# Altium PCB SparkFun_Tri_Axis_Accel_Breakout-H3LIS331DL.PcbDoc
Units mil, origin at the board's own origin, x right, y up, seen from the top; angles counter-clockwise.
Board outline 800 x 800 mil, 4 copper layers (Top, Route2, Route15, Bottom), stack 18.156 mil thick; 23 components, 10 nets, 51 pads, 12 vias.
Unrouted connection lines stored in the file: 1.
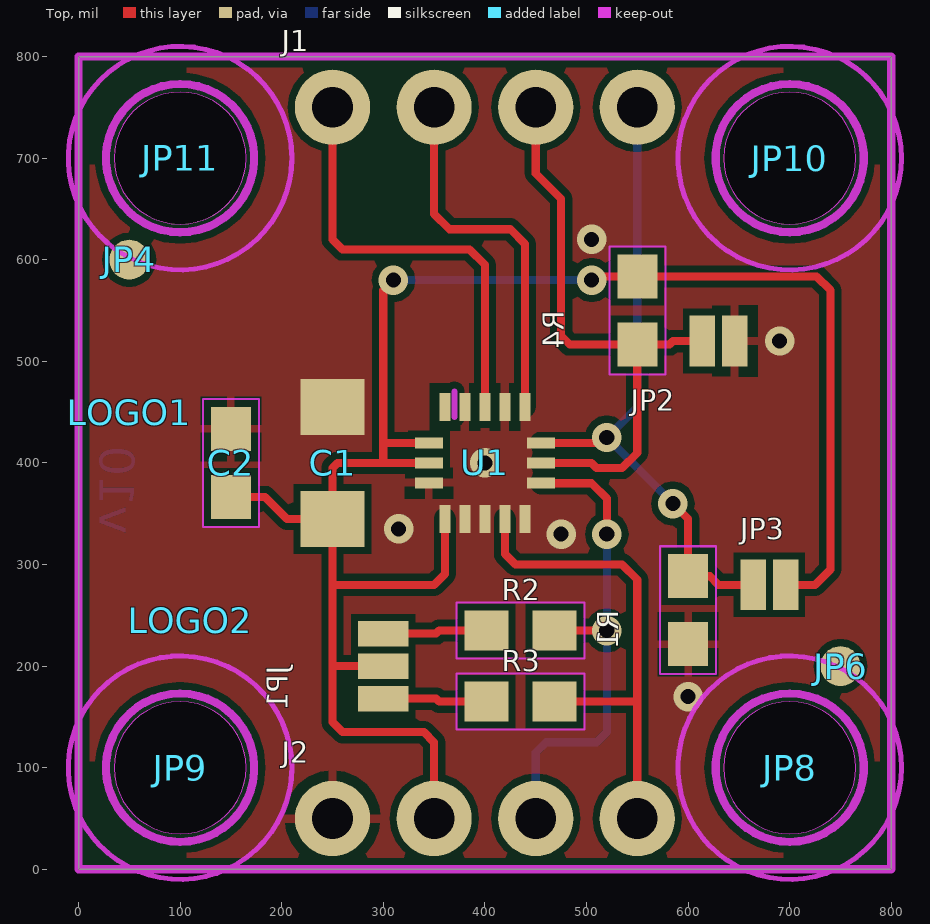
[diagram p0: Top view]
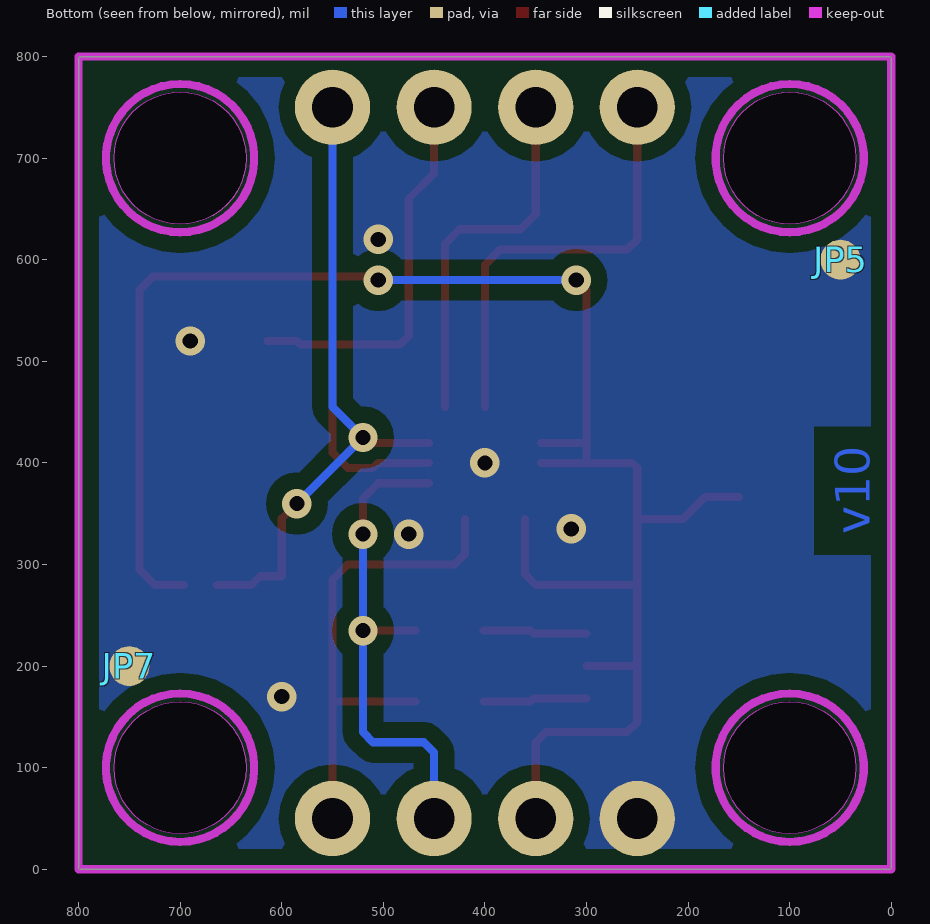
[diagram p1: Bottom view, seen from below]

## Layer stack, top to bottom
Top Solder: solder mask 0.4, Solder Resist, Dk 3.5
Top: signal copper 1.378
Dielectric 1: dielectric 12.6, FR-4, Dk 4.8
Route2: signal copper 1.4
Route15: signal copper 1.4
Bottom: signal copper 1.378
Bottom Solder: solder mask 0.4, Solder Resist, Dk 3.5

## Board outline
0,800 800,800 800,0 0,0
cut-out: 700,35 ccw(c700,100) 765,100 ccw(c700,100) 700,165 ccw(c700,100) 635,100 ccw(c700,100)
cut-out: 100,35 ccw(c100,100) 165,100 ccw(c100,100) 100,165 ccw(c100,100) 35,100 ccw(c100,100)
cut-out: 100,635 ccw(c100,700) 165,700 ccw(c100,700) 100,765 ccw(c100,700) 35,700 ccw(c100,700)
cut-out: 700,635 ccw(c700,700) 765,700 ccw(c700,700) 700,765 ccw(c700,700) 635,700 ccw(c700,700)

## Design rules (kind name [scope] priority, off if disabled: settings)
BoardOutlineClearance mdCopperDimension [All] p1: gap=10 ignorepadtopadclearanceinfootprint=FALSE except(0: Arc-SplitContinuation Track-SplitContinuation SMDPad-SplitContinuation THPad-SplitContinuation Via-SplitContinuation Fill-SplitContinuation Poly-SplitContinuation Region-SplitContinuation Text-SplitContinuation; 7: Poly-OutlineEdge Poly-CavityEdge Poly-CutoutEdge Poly-SplitBarrior)
Clearance Clearance_for_PolygonClass_Isolate_16 [InPolygonClass('Isolate_16') vs IsArc Or IsTrack Or IsPad Or IsVia Or IsFill Or IsRegion Or IsText] p1: gap=16 ignorepadtopadclearanceinfootprint=FALSE
Clearance "Clearance (Same Net)" [All] p2: gap=7 ignorepadtopadclearanceinfootprint=FALSE
Clearance [All] p3: gap=7 ignorepadtopadclearanceinfootprint=FALSE
HoleSize [All] p1: absolutevalues=TRUE maxlimit=100000 minlimit=15 maxpercent=80.000 minpercent=20.000
HoleToHoleClearance mdDrill [All] p1: gap=7 allowstackedmicrovias=TRUE
MinimumSolderMaskSliver [All] p1 off: minsoldermaskwidth=10
PasteMaskExpansion Expansion_SMDPaste_OFF [InPadClass('SMDPaste_OFF')] p1: expansion=0
PasteMaskExpansion mlMinCreamFrame [All] p2: expansion=0
PolygonConnect PolygonConnect_For_PolygonThermal_ON_Width80000_Gap100000 [InPolygonClass('PolygonThermal_ON_Width80000_Gap100000') vs Not IsVia] p1: connectstyle=Relief reliefconductorwidth=8 reliefentries=4 polygonreliefangle="90 Angle" airgapwidth=10
PolygonConnect ThermalVias [IsVia] p2: connectstyle=Direct reliefconductorwidth=10 reliefentries=4 polygonreliefangle="90 Angle" airgapwidth=10
PolygonConnect [All] p3: connectstyle=Relief reliefconductorwidth=10 reliefentries=4 polygonreliefangle="90 Angle" airgapwidth=10
RoutingVias [All] p1: holewidth=15 width=29 viastyle="Through Hole" minholewidth=15 minwidth=29 maxholewidth=100 maxwidth=100
SolderMaskExpansion mlMinStopFrame [All] p1: expansion=4 istentingtop=FALSE
Width [All] p1: maxlimit=10 minlimit=7 preferedwidth=7
26 further rules are at their usual default settings.

## Classes and differential pairs
polygon class PolygonThermal_ON_Width80000_Gap100000: Polygon_1_Net_GND Polygon_2_Net_GND
polygon class Isolate_16: Polygon_2_Net_GND
pad class SMDPaste_OFF: JP1-1 JP1-2 JP1-3 JP2-1 JP2-2 JP3-1 JP3-2 JP4-1 JP5-1 JP6-1 JP7-1

## Components (designator, comment, footprint, x,y, rotation, side; value= is the part's Value field where it differs from the comment)
C1 "10uF" EIA3216 250,400 r270 top
C2 "0.1uF" 0603 150,400 r90 top
FRAME1 "" CREATIVE_COMMONS 50,-750 r0 top
J1 "" 1X04 250,750 r0 top
J2 "" 1X04 250,50 r0 top
JP1 "JUMPER-SMT_3_2-NC_PASTE_NO-SILK" SMT-JUMPER_3_2-NC_PASTE_NO-SILK 300,200 r90 top
JP2 "JUMPER-SMT_2_NO_NO-SILK" SMT-JUMPER_2_NO_NO-SILK 630,520 r180 top
JP3 "JUMPER-SMT_2_NC_PASTE_NO-SILK" SMT-JUMPER_2_NC_PASTE_NO-SILK 680,280 r0 top
JP4 "" FIDUCIAL-1X2 50,600 r0 top
JP5 "" FIDUCIAL-1X2 50,600 r180 bottom
JP6 "" FIDUCIAL-1X2 750,200 r0 top
JP7 "" FIDUCIAL-1X2 750,200 r180 bottom
JP8 "" STAND-OFF 700,100 r0 top
JP9 "" STAND-OFF 100,100 r0 top
JP10 "" STAND-OFF 700,700 r0 top
JP11 "" STAND-OFF 100,700 r0 top
LOGO1 "" SFE_LOGO_FLAME_.1 50,450 r0 top
LOGO2 "" OSHW-LOGO-S 110,245 r0 top
R1 "10k" 0603 600,255 r90 top
R2 "4.7k" 0603 435,235 r0 top
R3 "4.7k" 0603 435,165 r0 top
R4 "10k" 0603 550,550 r90 top
U1 "H3LIS331DL" LGA-16-3X3 400,400 r90 top

## Footprints (in the part's own frame and the unit in brackets; to place one, negate y for a bottom-side part, rotate by r counter-clockwise, add the part's x,y. Pads: shape width x height; smd on the part's side, far side on the other; paste and mask are expansions set on the pad)
1X04 [mil] "1X04"
  round 74 hole 40: 1(0,0) 2(100,0) 3(200,0) 4(300,0)
0603 [mm] "0603"
  rect 1.1x1 smd: 1(-0.85,0) 2(0.85,0)
  Top keep-out lines w0.051: -1.6,0.7 -1.6,-0.7 1.6,-0.7 1.6,0.7 -1.6,0.7
CREATIVE_COMMONS [mil] "CREATIVE_COMMONS"
EIA3216 [mil] "EIA3216"
  rect 55.12x62.99 smd: +(55.12,0) -(-55.12,0)
FIDUCIAL-1X2 [mm] "FIDUCIAL-1X2"
  rrect100% 1x1 smd paste+0: 1(0,0)
LGA-16-3X3 [mm] "LGA-16-3X3"
  rect 0.7x0.28 smd: 1(-1.4,1) 2(-1.4,0.5) 3(-1.4,0) 4(-1.4,-0.5) 5(-1.4,-1) 9(1.4,-1) 10(1.4,-0.5) 11(1.4,0) 12(1.4,0.5) 13(1.4,1)
  rect 0.28x0.7 smd: 6(-0.5,-1.4) 7(0,-1.4) 8(0.5,-1.4) 14(0.5,1.4) 15(0,1.4) 16(-0.5,1.4)
OSHW-LOGO-S [mil] "OSHW-LOGO-S"
SFE_LOGO_FLAME_.1 [mil] "SFE_LOGO_FLAME_.1"
SMT-JUMPER_2_NC_PASTE_NO-SILK [mil] "SMT-JUMPER_2_NC_PASTE_NO-SILK"
  rect 25x50 smd paste+0: 1(-16,0) 2(16,0)
SMT-JUMPER_2_NO_NO-SILK [mil] "SMT-JUMPER_2_NO_NO-SILK"
  rect 25x50 smd paste+0: 1(-16,0) 2(16,0)
SMT-JUMPER_3_2-NC_PASTE_NO-SILK [mil] "SMT-JUMPER_3_2-NC_PASTE_NO-SILK"
  rect 25x50 smd paste+0: 1(-32,0) 2(0,0) 3(32,0)
STAND-OFF [mil] "STAND-OFF"
  Top keep-out circle w5: c0,0 r110
  Top keep-out lines w8: 0,-73 cw(c0,0) 0,73 cw(c0,0) 0,-73
  Bottom keep-out lines w8: 0,-73 cw(c0,0) 0,73 cw(c0,0) 0,-73

## Part data
C1: library part EIA3216, PackageName=EIA3216
C2 R1 R2 R3 R4: library part 0603, PackageName=0603
FRAME1: library part CREATIVE_COMMONS, PackageName=CREATIVE_COMMONS
J1 J2: library part 1X04, PackageName=1X04
JP1: library part SMT-JUMPER_3_2-NC_PASTE_NO-SILK, PackageName=SMT-JUMPER_3_2-NC_PASTE_NO-SILK
JP2: library part SMT-JUMPER_2_NO_NO-SILK, PackageName=SMT-JUMPER_2_NO_NO-SILK
JP3: library part SMT-JUMPER_2_NC_PASTE_NO-SILK, PackageName=SMT-JUMPER_2_NC_PASTE_NO-SILK
JP4 JP5 JP6 JP7: library part FIDUCIAL-1X2, PackageName=FIDUCIAL-1X2
JP8 JP9 JP10 JP11: library part STAND-OFF, PackageName=STAND-OFF
LOGO1: library part SFE_LOGO_FLAME_.1, PackageName=SFE_LOGO_FLAME_.1
LOGO2: library part OSHW-LOGO-S, PackageName=OSHW-LOGO-S
U1: library part LGA-16-3X3, PackageName=LGA-16-3X3

## Free pads (board coordinates)
  round 130 hole 130 unplated: MH1(100,100) MH1(100,700) MH1(700,100) MH1(700,700)

## Via types
v1: diameter 29/29/29/29 (per signal layer), hole 15, Top to Bottom, 12 vias

## Nets (pads, with @x,y where several pads share a name; then routed paths per layer and width w, separated by ;. In a path a pad name is that pad's centre, name@x,y a point inside that pad or via, vN(x,y) a via of type N, cw(c..) or ccw(c..) an arc to the next point about the centre after c; other vN are vias at no path point)
3.3V: C1.+ C2.1 J2.2 JP1.2 JP3.2 R4.2 U1.1 U1.14 U1.15 | length 1849.9
  Top w8: C2.1 183.46,366.54 205.12,344.88 C1.+ ; JP1.2 250,200 ; v1(310,580) 300,570 300,420 ; U1.15 300,400 ; U1.14 300.32,419.69 300,420 ; J2.2 350,125 340,135 260,135 250,145 250,200 ; U1.1 360.63,290.63 350,280 250,280 ; v1(505,580) 508.46,583.46 R4.2 726.54,583.46 740,570 740,295 725,280 JP3.2 ; 250,200 250,280 ; 250,280 C1.+ ; C1.+ 250,395 255,400 300,400 ; 300,400 300,420
  Bottom w8: v1(310,580) v1(505,580)
CS: J1.4 JP3.1 R1.2 U1.8 | length 641.7
  Top w8: U1.8 514.68,419.69 v1(520,425) ; v1(585,360) 600,345 R1.2 621.54,288.46 630,280 JP3.1
  Bottom w8: J1.4 550,455 v1(520,425) v1(585,360)
GND: C1.- C2.2 J2.1 JP2.1 R1.1 U1.5 U1.10 U1.12 U1.13 U1.16
  other v1: 600,170 475,330 315,335 400,400 690,520 505,620
INT1: J1.1 U1.11 | length 430.2
  Top w8: J1.1 250,620 260,610 385,610 400,595 U1.11
INT2: J1.2 U1.9 | length 367
  Top w8: J1.2 350,645 365,630 425,630 439.37,615.63 U1.9
N$1: JP1.1 R3.1 | length 102.8
  Top w8: JP1.1 352,168 355,165 R3.1
N$2: JP1.3 R2.1 | length 102.8
  Top w8: JP1.3 352,232 355,235 R2.1
SA0: J1.3 JP2.2 R4.1 U1.7 | length 589
  Top w8: J1.3 450,685 475,660 475,525 483.46,516.54 R4.1 ; U1.7 505,400 510,395 535,395 550,410 R4.1 ; JP2.2 585,520 581.54,516.54 R4.1
SCL: J2.4 R3.2 U1.4 | length 491.9
  Top w8: U1.4 419.69,310.32 430,300 535,300 550,285 550,165 ; R3.2 550,165 ; J2.4 550,165
SDA: J2.3 R2.2 U1.6 | length 496.1
  Top w8: U1.6 455.43,380 505,380 520,365 v1(520,330) ; R2.2 v1(520,235)
  Bottom w8: J2.3 450,115 460,125 510,125 520,135 v1(520,235) v1(520,330)
pads on no net: JP4.1 JP5.1 JP6.1 JP7.1 U1.2 U1.3

## Polygon pours and split planes (outlines as drawn)
GND on Top "Polygon_1_Net_GND" (solid, remove dead copper, pour order 1): -4,804 -4,-4 804,-4 804,804
GND on Bottom "Polygon_2_Net_GND" (solid, remove dead copper, pour order 0): -4,804 -4,-4 804,-4 804,804

## Keep-outs
Top:
  lines w6: 370,445 370,470
Keep-Out Layer:
  the board outline again, w8

## Other copper
Bottom:
  text "v10" at 21.01,330.03 h34 r270

## Silkscreen, mask and mechanical layers (free items; w line width, h text height)
Dimension:
  the board outline again, w8
tDocu:
  text "Mike Hord" at 1250,-750 h59.5
tPlace:
  circle w10: c690,360 r5
  circle w10: c690,360 r36.06
  lines w8: 800,0 800,800
  lines w10: 585,365 610,340 ; 635,365 610,340 ; 685,415 710,440 ; 685,465 710,440 ; 610,340 610,440 710,440
  text "H3LIS331DL" at 190,630 h42.5
  text "SA0" at 602.49,562.81 h27.2
  text "y" at 710,465 h42.5
  text "x" at 550,390 h42.5
  text "z" at 745,310 h42.5
  text "CS" at 655,210 h27.2
  text "I2C PU" at 260,125 h27.2 r90
bPlace:
  text "CS" at 525,620 h42.5 r270
  text "SA0" at 425,575 h42.5 r270
  text "INT1" at 225,545 h42.5 r270
  text "INT2" at 325,545 h42.5 r270
  text "GND" at 225,100 h42.5 r270
  text "3.3V" at 325,100 h42.5 r270
  text "SDA" at 425,100 h42.5 r270
  text "SCL" at 525,100 h42.5 r270
Measures:
  text "typ." at -81.4,318.43 h27.2 r90
  text "Units in inches" at 400,-50 h27.2
  text "typ." at 315,-240 h27.2

## Dimensions
0,0 to 100,100 on Measures
0,0 to 100,100 on Measures
0,0 to 400,400 on Measures
0,0 to 0,800 on Measures
0,800 to 400,400 on Measures
0,800 to 800,800 on Measures

## Text inside footprints (layer, text, board x,y; h text height)
FRAME1: tDocu "Designed by:" at 500,-750 h59.5; tDocu "https://creativecommons.org/licenses/by-sa/4.0/" at 50,-650 h59.5; tDocu "Released under the Creative Commons Attribution Share-Alike 4.0 License" at -750,-550 h59.5